# Altium PCB Display.PcbDoc
Units mil, origin at the board's own origin, x right, y up, seen from the top; angles counter-clockwise.
Board outline 5000 x 2735 mil, 2 copper layers (Top Layer, Bottom Layer), stack 65.792 mil thick; 66 components, 70 nets, 323 pads, 129 vias.
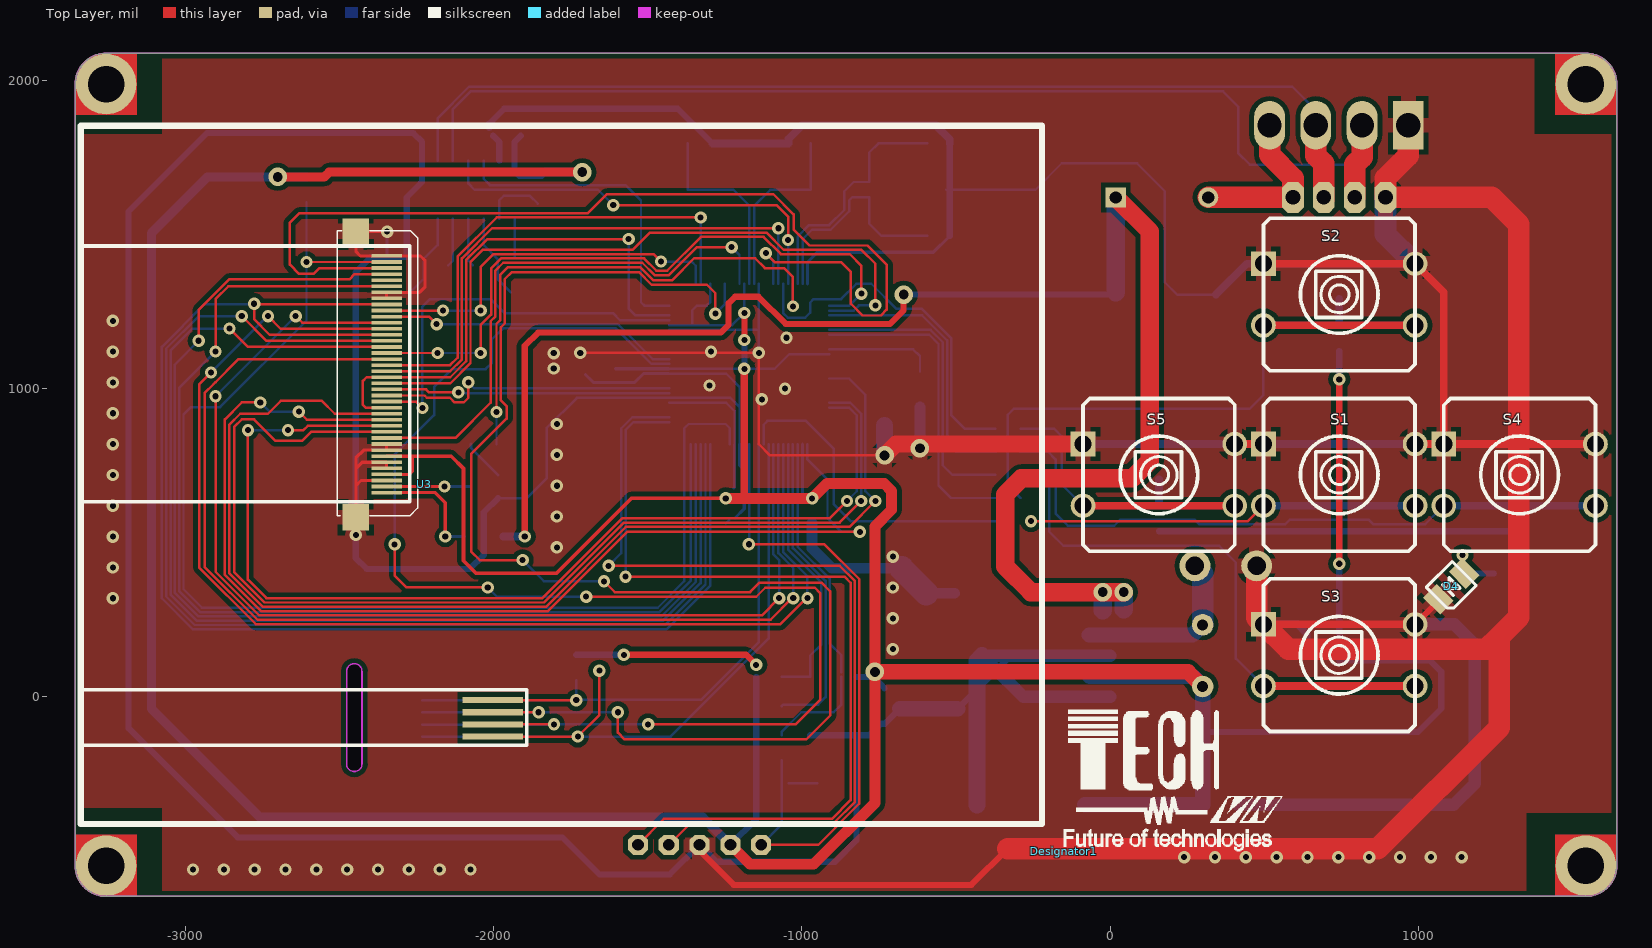
[diagram p0: Top Layer view]
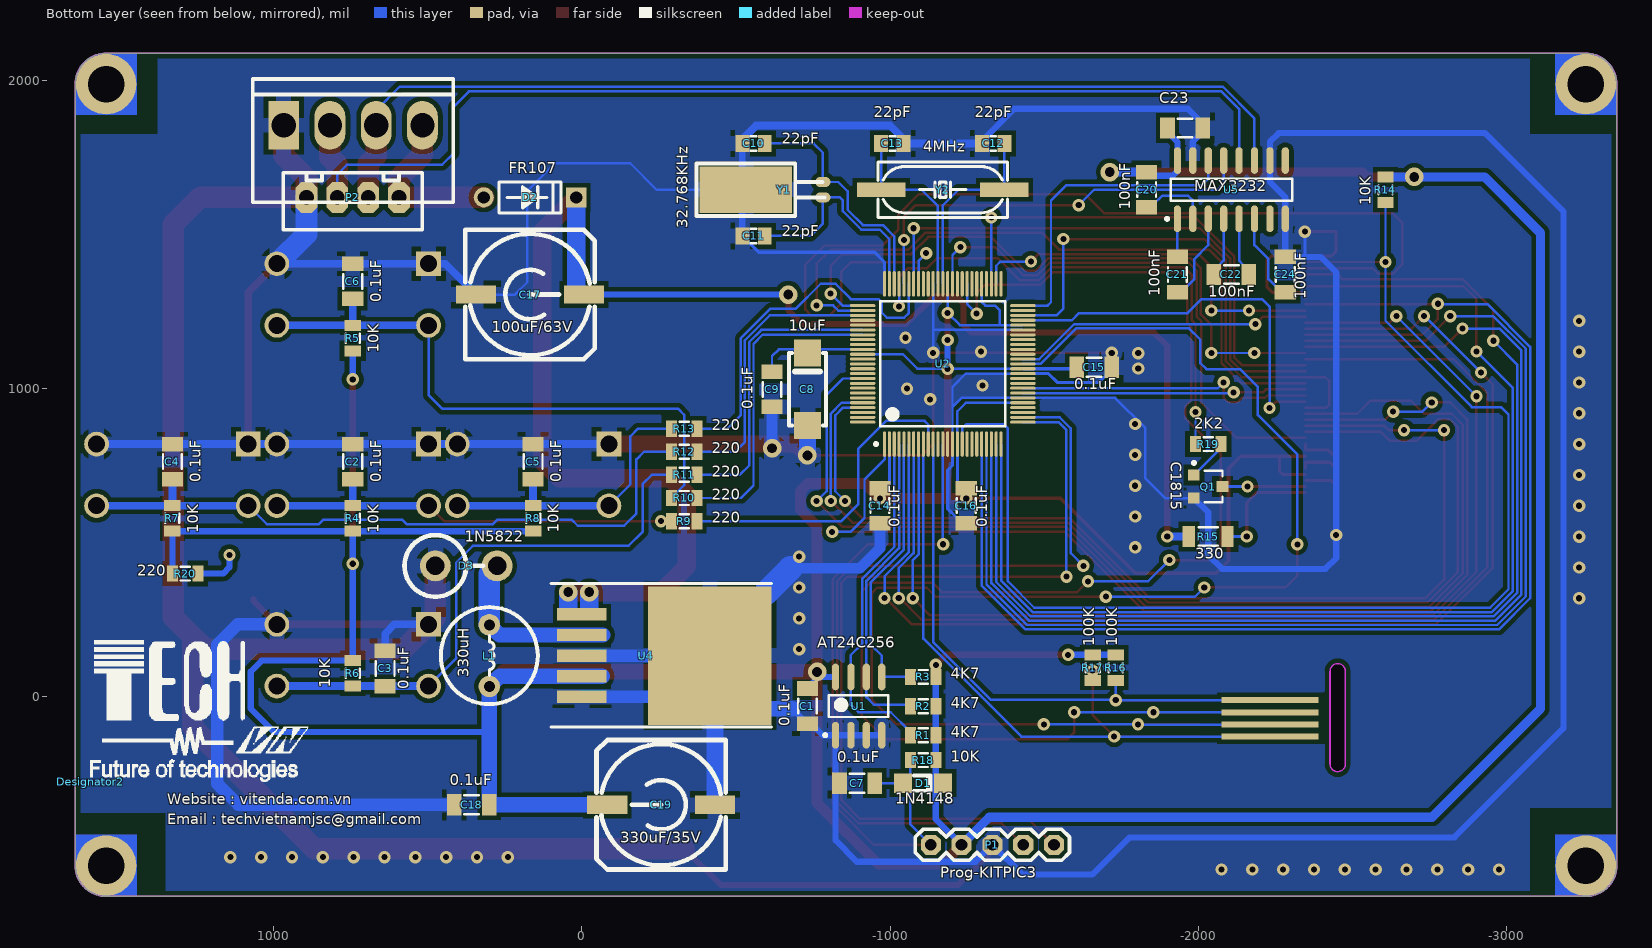
[diagram p1: Bottom Layer view, seen from below]

## Layer stack, top to bottom
Top Layer: signal copper 1.4
Dielectric: core 62.9921, FR-4, Dk 4.8
Bottom Layer: signal copper 1.4

## Board outline
-3357,-547.28 -3357,1987.72 cw(c-3257,1987.72) -3257,2087.72 1543,2087.72 cw(c1543,1987.72) 1643,1987.72 1643,-547.28 cw(c1543,-547.28) 1543,-647.28 -3257,-647.28 cw(c-3257,-547.28)
cut-out: -2427,-218.78 cw(c-2450,-218.78) -2450,-241.78 -2452.5,-241.78 cw(c-2452.5,-217.28) -2477,-217.28 -2477,81.22 cw(c-2451,81.22) -2451,107.22 cw(c-2451,83.22) -2427,83.22

## Design rules (kind name [scope] priority, off if disabled: settings)
Clearance [All] p1: gap=4
HoleSize [All] p1: absolutevalues=TRUE maxlimit=10000 minlimit=1 maxpercent=80.000 minpercent=20.000
HoleToHoleClearance [All] p1: gap=10 allowstackedmicrovias=FALSE
MinimumSolderMaskSliver [All] p1: minsoldermaskwidth=0
PolygonConnect [All] p1: connectstyle=Relief reliefconductorwidth=50 reliefentries=4 polygonreliefangle="90 Angle"
RoutingVias [All] p1: holewidth=19.68 width=40 viastyle="Through Hole" minholewidth=15.75 minwidth=20 maxholewidth=47.24 maxwidth=100
SilkToSilkClearance [All] p1: silktosilkclearance=0
SilkscreenOverComponentPads [All] p1: minsilkscreentomaskgap=0
SolderMaskExpansion SolderMaskExpansion_Vias [isvia] p1: expansion=-30
SolderMaskExpansion [All] p2: expansion=1.5
TestPointUsage [All] p1: valid=0 allowmultiple=FALSE
Testpoint [All] p1: side=15 testpointundercomponent=TRUE minsize=40 maxsize=100 preferedsize=60 minholesize=0 maxholesize=40 preferedholesize=32 testpointgrid=1 style=1023 order=0123456789
Width [All] p1: maxlimit=1001 minlimit=6 preferedwidth=10
19 further rules are at their usual default settings.

## Components (designator, comment, footprint, x,y, rotation, side; value= is the part's Value field where it differs from the comment)
C1 "0.1uF" C1206 -732,-29.78 r90 bottom
C2 "0.1uF" C1206 743,763.13 r270 bottom
C3 "0.1uF" C1206 638,92.3 r270 bottom
C4 "0.1uF" C1206 1328,763.13 r270 bottom
C5 "0.1uF" C1206 158,763.13 r270 bottom
C6 "0.1uF" C1206 743,1348.13 r270 bottom
C7 "0.1uF" C1206 -892.98,-279.78 r0 bottom
C8 "10uF" C106-SMD -732,880.22 r90 bottom
C9 "0.1uF" C1206 -617,997.72 r270 bottom
C10 "22pF" C0805 -557,1795.22 r180 bottom
C11 "22pF" C0805 -557,1495.22 r180 bottom
C12 "22pF" C0805 -1334.56,1795.22 r180 bottom
C13 "22pF" C0805 -1007.39,1795.22 r0 bottom
C14 "0.1uF" C1206 -967,620.22 r270 bottom
C15 "0.1uF" C1206 -1662,1069.31 r180 bottom
C16 "0.1uF" C1206 -1247,620.22 r270 bottom
C17 "100uF/63V" CAP-100UF/63V -7,1305.22 r0 bottom
C18 "0.1uF" C1206 357.09,-350 r180 bottom
C19 "330uF/35V" CAP-100UF/63V -82.5,-350 r180 bottom
C20 "100nF" C1206 -1832,1645.22 r90 bottom
C21 "100nF" C1206 -1932,1370.22 r90 bottom
C22 "100nF" C1206 -2107,1370.22 r0 bottom
C23 "100nF" C1206 -1957,1845.22 r180 bottom
C24 "100nF" C1206 -2282,1370.22 r90 bottom
D1 "1N4148" 1N4148-SMD -1042,-279.78 r180 bottom
D2 "FR107" DIODE-1A/300 318,1620.22 r180 bottom
D3 "1N5822" FR307 475,425 r180 bottom
D4 "LED" LED-1206/100x100 1148,400.22 r225 top
Designator1 "Comment" ?#1 -150,-500 r0 top
Designator2 "Comment" ?#1 1595,-275 r180 bottom
L1 "330uH" L-330uH 300,233.86 r270 bottom
P1 "Prog-KITPIC3" "HEADER 5B" -1132,-479.78 r180 bottom
P2 "Header 4" HEADER4X 593,1620.22 r0 bottom
Q1 "C1815" SOT23A -2032,682.4 r270 bottom
R1 "4K7" R0805 -1107,-124.27 r0 bottom
R2 "4K7" R0805 -1107,-29.78 r0 bottom
R3 "4K7" R0805 -1107,64.7 r0 bottom
R4 "10K" R0805 743,578.88 r270 bottom
R5 "10K" R0805 743,1163.88 r270 bottom
R6 "10K" R0805 743,76.56 r90 bottom
R7 "10K" R0805 1328,578.88 r270 bottom
R8 "10K" R0805 158,578.88 r270 bottom
R9 "220" R0805 -332,570.22 r0 bottom
R10 "220" R0805 -332,645.22 r0 bottom
R11 "220" R0805 -332,720.22 r0 bottom
R12 "220" R0805 -332,795.22 r0 bottom
R13 "220" R0805 -332,870.22 r0 bottom
R14 "10K" R0805 -2607,1645.22 r270 bottom
R15 "330" R1206 -2032,520.22 r0 bottom
R16 "100K" R0805 -1732,95.22 r270 bottom
R17 "100K" R0805 -1657,95.22 r270 bottom
R18 "10K" R0805 -1107,-204.78 r0 bottom
R19 "2K2" R0805 -2032,820.22 r0 bottom
R20 "220" R0805 1286.66,400.22 r0 bottom
S1 "SW-PB" BUTON-B3F 988.98,820.22 r0 top
S2 "SW-PB" BUTON-B3F 988.98,1405.22 r0 top
S3 "SW-PB" BUTON-B3F 988.98,235.22 r0 top
S4 "SW-PB" BUTON-B3F 1573.98,820.22 r0 top
S5 "SW-PB" BUTON-B3F 403.98,820.22 r0 top locked
U1 "AT24C256" 8-SOIC_751 -898,-29.78 r90 bottom
U2 "PIC24FJ256DA210" TQFP-PT100_M -982,820.22 r90 bottom
U3 "TFT32" TFT-32 -2347,662.72 r270 top locked
U4 "LM2576D2T-3.3" LM2576HVS-SMT 0,267.72 r270 bottom
U5 "MAX3232" NSO16_N -2107,1645.22 r90 bottom
Y1 "32.768KHz" ?#2 -782,1620.22 r0 bottom
Y2 "4MHz" XTA_SMD -1370.98,1645.22 r0 bottom

## Footprints (in the part's own frame and the unit in brackets; to place one, negate y for a bottom-side part, rotate by r counter-clockwise, add the part's x,y. Pads: shape width x height; smd on the part's side, far side on the other; paste and mask are expansions set on the pad)
1N4148-SMD [mm]
  rect 1.5x1.6 smd: 1(0,0) 2(3.302,0)
  silkscreen extent 0.89,-0.64 2.29,0.63, body extent 0.65,-0.64 2.65,0.62, height 0.78
8-SOIC_751 [mm] "SOIC, 8-Leads, Body 4.9x3.9mm (max), Pitch 1.27mm, IPC Medium Density"
  oval 2.2x0.6 smd: 1(-2.4,1.905) 2(-2.4,0.635) 3(-2.4,-0.635) 4(-2.4,-1.905) 5(2.4,-1.905) 6(2.4,-0.635) 7(2.4,0.635) 8(2.4,1.905)
  silkscreen extent -2.52,-2.45 0.9,2.88, body extent -1.95,-2.45 1.95,2.45, height 1.55
BUTON-B3F [mil]
  rect 80x80 hole 55.12: 1(-491.97,0)
  round 80 hole 55.12: 1(0,0) 2(-491.97,-200) 2(0,-200)
  silkscreen extent -492,-348 0,148
C106-SMD [mm]
  rect 2.2x2.2 smd: 1(5.969,0) 2(0,0)
  silkscreen extent 0,-1.52 5.97,1.52
C0805 [mm] "Chip Capacitor, 2-Leads, Body 2.0x1.3mm, IPC Medium Density"
  rect 1.15x1.4 smd: 1(-0.925,0) 2(0.925,0)
  silkscreen extent -0.22,-0.6 0.23,0.6, body extent -1,-0.63 1,0.63, height 0.85
C1206 [mm] "Chip Capacitor, 2-Leads, Body 3.2x1.6mm, IPC Medium Density"
  rect 1.2x1.75 smd: 1(-1.45,0) 2(1.45,0)
  silkscreen extent -0.6,-0.77 0.6,0.77, body extent -1.6,-0.8 1.6,0.8, height 1.6
CAP-100UF/63V [mil] "Capacitor 100uF63V SMD"
  rect 130x59 smd: 1(0,0) 2(350,0)
  silkscreen extent -35,-210 385,210
DIODE-1A/300 [mil]
  round 65 hole 39.37: 1(0,0)
  rect 65x65 hole 39.37: 2(300,0)
  silkscreen extent 50,-50 250,50
FR307 [mil]
  round 100 hole 60: 1(0,0) 2(200,0)
  silkscreen extent -100,-100 155,100
HEADER4X [mil]
  oct 70x100 hole 47.24: 1(0,0) 2(100,0) 3(200,0) 4(300,0)
  silkscreen extent -75,-80 375,105
"HEADER 5B" [mil]
  oct 65x65 hole 38: 1(0,0) 2(100,0) 3(200,0) 4(300,0) 5(400,0)
  silkscreen extent -50,-50 450,50
L-330uH [mil]
  round 70 hole 35.43: 1(0,0) 2(200,0)
  silkscreen extent -57,-157 257,157
LED-1206/100x100 [mm]
  rect 1.6x2 smd: 1(0,0) 2(3,0)
  silkscreen extent 0,-1.4 3,1.4, body extent -0.25,-1.4 3.25,1.3, height 1.95
LM2576HVS-SMT [mil]
  rect 40x160 smd: 1(0,0) 2(66.93,0) 3(133.86,0) 4(200.79,0) 5(267.72,0)
  rect 450x400 smd: 6(133.86,415.35)
  silkscreen extent -100,-100 365,615
NSO16_N [mm] "SOIC, 16-Leads, Body 9.9x3.9mm, Pitch 1.27mm, IPC Medium Density"
  oval 2.2x0.6 smd: 1(-2.4,4.445) 2(-2.4,3.175) 3(-2.4,1.905) 4(-2.4,0.635) 5(-2.4,-0.635) 6(-2.4,-1.905) 7(-2.4,-3.175) 8(-2.4,-4.445) 9(2.4,-4.445) 10(2.4,-3.175) 11(2.4,-1.905) 12(2.4,-0.635) 13(2.4,0.635) 14(2.4,1.905) 15(2.4,3.175) 16(2.4,4.445)
  silkscreen extent -2.52,-5 0.9,5.42, body extent -1.95,-4.95 1.95,4.95, height 1.75
R0805 [mm] "Chip Resistor, 2-Leads, Body 2.0x1.3mm, IPC Medium Density"
  rect 0.9x1.35 smd: 1(-1.05,0) 2(1.05,0)
  silkscreen extent -0.38,-0.58 0.38,0.58, body extent -1,-0.63 1,0.63, height 0.6
R1206 [mm] "Chip Resistor, 2-Leads, Body 3.2x1.6mm, IPC Medium Density"
  rect 1x1.75 smd: 1(-1.6,0) 2(1.6,0)
  silkscreen extent -0.8,-0.77 0.8,0.77, body extent -1.6,-0.8 1.6,0.8, height 0.6
SOT23A [mm] "SOT-23; 3 Leads; Body 3.0 x 2.5 mm, inc. leads (LxW max)"
  rect 0.9x0.95 smd: 1(-0.95,-1.175) 2(0.95,-1.175) 3(0,1.175)
  silkscreen extent -2.07,-1.3 1.3,1.18
TFT-32 [mm] "LCD TFT 3.2 inch with touch screen"
  rect 2.2x2.2 smd: 0(-21.503,-2.54) 0(2.032,-2.54)
  rect 0.3x2.5 smd: 1(0,0) 2(-0.5,0) 3(-1,0) 4(-1.5,0) 5(-2,0) 6(-2.5,0) 7(-3,0) 8(-3.5,0) 9(-4,0) 10(-4.5,0) 11(-5,0) 12(-5.5,0) 13(-6,0) 14(-6.5,0) 15(-7,0) 16(-7.5,0) 17(-8,0) 18(-8.5,0) 19(-9,0) 20(-9.5,0) 21(-10,0) 22(-10.5,0) 23(-11,0) 24(-11.5,0) 25(-12,0) 26(-12.5,0) 27(-13,0) 28(-13.5,0) 29(-14,0) 30(-14.5,0) 31(-15,0) 32(-15.5,0) 33(-16,0) 34(-16.5,0) 35(-17,0) 36(-17.5,0) 37(-18,0) 38(-18.5,0) 39(-19,0) 40(-19.5,0)
  rect 0.5x5 smd: 41(20.1,8.75) 42(19.1,8.75) 43(18.1,8.75) 44(17.1,8.75)
  silkscreen extent -30.23,-25.2 27.31,54
TQFP-PT100_M [mm] "Thin QFP, 100-Leads, Body 12x12mm, Pitch 0.4mm, IPC Low Density"
  oval 2.1x0.254 smd: 1(0,0) 2(0,-0.4) 3(0,-0.8) 4(0,-1.2) 5(0,-1.6) 6(0,-2) 7(0,-2.4) 8(0,-2.8) 9(0,-3.2) 10(0,-3.6) 11(0,-4) 12(0,-4.4) 13(0,-4.8) 14(0,-5.2) 15(0,-5.6) 16(0,-6) 17(0,-6.4) 18(0,-6.8) 19(0,-7.2) 20(0,-7.6) 21(0,-8) 22(0,-8.4) 23(0,-8.8) 24(0,-9.2) 25(0,-9.6) 51(13.2,-9.6) 52(13.2,-9.2) 53(13.2,-8.8) 54(13.2,-8.4) 55(13.2,-8) 56(13.2,-7.6) 57(13.2,-7.2) 58(13.2,-6.8) 59(13.2,-6.4) 60(13.2,-6) 61(13.2,-5.6) 62(13.2,-5.2) 63(13.2,-4.8) 64(13.2,-4.4) 65(13.2,-4) 66(13.2,-3.6) 67(13.2,-3.2) 68(13.2,-2.8) 69(13.2,-2.4) 70(13.2,-2) 71(13.2,-1.6) 72(13.2,-1.2) 73(13.2,-0.8) 74(13.2,-0.4) 75(13.2,0)
  oval 0.254x2.1 smd: 26(1.8,-11.4) 27(2.2,-11.4) 28(2.6,-11.4) 29(3,-11.4) 30(3.4,-11.4) 31(3.8,-11.4) 32(4.2,-11.4) 33(4.6,-11.4) 34(5,-11.4) 35(5.4,-11.4) 36(5.8,-11.4) 37(6.2,-11.4) 38(6.6,-11.4) 39(7,-11.4) 40(7.4,-11.4) 41(7.8,-11.4) 42(8.2,-11.4) 43(8.6,-11.4) 44(9,-11.4) 45(9.4,-11.4) 46(9.8,-11.4) 47(10.2,-11.4) 48(10.6,-11.4) 49(11,-11.4) 50(11.4,-11.4) 76(11.4,1.8) 77(11,1.8) 78(10.6,1.8) 79(10.2,1.8) 80(9.8,1.8) 81(9.4,1.8) 82(9,1.8) 83(8.6,1.8) 84(8.2,1.8) 85(7.8,1.8) 86(7.4,1.8) 87(7,1.8) 88(6.6,1.8) 89(6.2,1.8) 90(5.8,1.8) 91(5.4,1.8) 92(5,1.8) 93(4.6,1.8) 94(4.2,1.8) 95(3.8,1.8) 96(3.4,1.8) 97(3,1.8) 98(2.6,1.8) 99(2.2,1.8) 100(1.8,1.8)
  silkscreen extent -0.12,-9.95 11.75,0.82, body extent 0.6,-10.8 12.6,1.2, height 1.2
XTA_SMD [mm]
  rect 4x1.2 smd: 1(0,0) 2(10.16,0)
  silkscreen extent -0.25,-2.29 10.41,2.29
?#1 [mil]
  silkscreen extent 0,0 708,458
?#2 [mil]
  rect 300x150 smd: 0(250,-25)
  oval 50x32 smd: 1(0,0) 2(0,-50)
  silkscreen extent -5,-110 410,60

## Part data
C1 C2 C3 C4 C5 C6 C7 C9 C10 C11 C12 C13 C14 C15 C16 C18: library part Cap, "Capacitor"
C8 C17 C19: library part "Cap Pol1", "Polarized Capacitor (Radial)"
C20 C21 C22 C23 C24: library part Cap, "CAP CER .1UF 16V 10% X7R 0603"
D1 D2: library part "Diode 1N4148", "High Conductance Fast Diode"
D3: library part DIODE, "Diode"
D4: library part LED0, "Typical INFRARED GaAs LED"
L1: library part "Inductor Iron", "Magnetic-Core Inductor"
P1: library part "Header 5", "Header, 5-Pin"
P2: "Header, 4-Pin"
Q1: library part NPN, "NPN Bipolar Transistor"
R1 R2 R3 R4 R5 R6 R7 R8 R9 R10 R11 R12 R13 R14 R15 R16 R17 R18 R19 R20: library part Res1, "Resistor"
S1 S2 S3 S4 S5: "Switch"
U1: library part 24AA1025-I/SM, "1 Mbit, 400kHz, 1.7V, I2C Serial EEPROM, 8-Pin SOIC 208mil, Industrial Temperature"
U2: "Graphic Controller"
U3: "LCD TFT 3.2 inch with touch screen"
U4: "Easy Switcher 3.0A Step-Down Voltage Regulator"
U5: library part MAX3232CSE, "3.0V TO 5.5V, Low-Power, up to 1Mbps, True RS-232 Transceiver Using Four 0.1µF External Capacitor"
Y1 Y2: library part XTAL, "Crystal Oscillator"

## Free pads (board coordinates)
  round 196.85 hole 118.11: 0(-3257,-547.28) 0(-3257,1987.72) 0(1543,-547.28) 0(1543,1987.72)
  rect 100x157.48 hole 78.74: 1(967,1854.22)
  rect 314.96x19.68 smd far side: 2(-2232,-10.51) 6(-2232,-50.32) 7(-2232,-89.69) 8(-2232,-128.62)
  oval 100x157.48 hole 78.74: 2(817,1854.22) 3(667,1854.22) 4(517,1854.22)

## Via types
v1: diameter 40, hole 19.68, Top Layer to Bottom Layer, 120 vias
v2: diameter 60, hole 31.5, Top Layer to Bottom Layer, 8 vias
v3: diameter 38, hole 19.68, Top Layer to Bottom Layer, 1 vias

## Nets (pads, with @x,y where several pads share a name; then routed paths per layer and width w, separated by ;. In a path a pad name is that pad's centre, name@x,y a point inside that pad or via, vN(x,y) a via of type N, cw(c..) or ccw(c..) an arc to the next point about the centre after c; other vN are vias at no path point)
+20V: C17.1 D2.2 R15.2 U4.1 | length 5299.9
  Top Layer w20: v1(-1899,520.22) -1899,1139 -1856,1182 -1263,1182 -1238,1207 -1238,1277 -1217,1298 -1141,1298 -1053,1210 -714,1210 -670,1254 v2@-670,1321
  Top Layer w60: D2.2 129,1509.22 129,766 72,709 -288,709 -341,656 -341,424 -257,340 v2(-24,340) v2(44,340)
  Bottom Layer w20: v2@-671,1305.22 C17.1
  Bottom Layer w25: R15.2 v1(-1899,520.22)
  Bottom Layer w60: U4.1@-24,281 v2(-24,340) ; C17.1@18,1312.22 D2.2 ; U4.1@44,285 v2(44,340)
  other v2: -670,1305.22
BACKLIGHT: R19.2 U2.72 | length 1766.2
  Top Layer w8: v1@-1991,921 v1@-1991,924.34 ; v1(-1990.66,924.34) -1990.66,1210.34 -1978,1223 -1978,1370 -1955,1393 -1524,1393 -1482,1351 -1422,1351 -1350,1423 -1152,1423 -1120,1391 -1058,1391 -1029.24,1362.24 v3(-1029.24,1267)
  Bottom Layer w8: R19.2 v1(-1990.66,924.34) ; v3@-1029.24,1258 v3(-1029.24,1267) U2.72
CS: R14.2 U2.17 U3.39 | length 4121.4
  Top Layer w8: v1(-2607,1410.75) U3.39
  Bottom Layer w8: v1@-2607,1405.22 -2607,1220.22 -2887,940.22 -2982,940.22 -3006,916.22 -3006,349.02 -2946.2,289.22 -1467.8,289.22 -1382,375.01 -1382,870.22 -1367,885.22 -1247,885.22 -1233.97,872.18 U2.17 ; v1(-2607,1410.75) R14.2
DC: U2.25 U3.35 | length 3741.6
  Top Layer w8: v1(-2902,1120.22) -2902,1290.22 -2860.21,1332.01 U3.35
  Bottom Layer w8: v1(-2902,1120.22) -3020,1002.22 -3020,343.22 -2952,275.22 -1462,275.22 -1359.95,377.26 U2.25
DOWN: C3.2 R6.1 R11.2 S3.2 | length 2328.3
  Top Layer w25: S3.2@497.02,35.22 S3.2@988.98,35.22
  Bottom Layer w8: R11.2 -227,720.22 -197,690.22 -197,535.22 -152,490.22 353,490.22 408,435.22 408,124.23 S3.2@497.02,35.22
  Bottom Layer w25: S3.2@497.02,35.22 C3.2 R6.1 S3.2@988.98,35.22
ENTER: C2.2 R4.1 R9.2 S1.2 | length 1352.5
  Top Layer w8: v1(-257,570.22) 447.02,570.22 S1.2@497.02,620.22
  Bottom Layer w25: S1.2@497.02,620.22 R4.1 ; C2.2 R4.1 ; S1.2@988.98,620.22 R4.1
GCLK: U2.1 U3.13 | length 3681.2
  Top Layer w8: v1(-2757,955.22) -2817,955.22 -2872,900.22 -2872,395.82 -2754.4,278.22 -1824,278.22 -1567,535.22 v1(-812,535.22) ; v1(-2632,925.22) -2605.72,898.94 U3.13
  Bottom Layer w8: v1(-2757,955.22) -2727,925.22 v1(-2632,925.22) ; U2.1 -982,770.22 -917,705.22 -917,580.22 -872,535.22 v1(-812,535.22)
GD0: U2.6 U3.28 | length 3926
  Top Layer w8: v1(-2917,1052.22) -2955.5,1013.72 -2955.5,419.93 -2771.79,236.22 -1069.57,236.22 -985.57,320.22 v1(-982,320.22) ; v1(-2732,1235.22) -2691,1194.21 U3.28
  Bottom Layer w8: v1(-2917,1052.22) v1@-2734,1235.22 ; U2.6 -1060.74,470.22 -982,391.48 v1(-982,320.22)
GD1: U2.8 U3.29 | length 3658.2
  Top Layer w8: v1(-2902,975.22) -2902,406.02 -2760.19,264.22 -1130,264.22 v1(-1074,320.22) ; v1(-2642,1235.22) -2620.68,1213.9 U3.29
  Bottom Layer w8: v1(-2902,975.22) v1(-2642,1235.22) ; U2.8 -1092.24,462.11 -1074,443.88 v1(-1074,320.22)
GD2: U2.39 U3.30 | length 973.2
  Top Layer w8: U3.30 -2209.37,1233.58 v1(-2185,1209.22)
  Bottom Layer w8: v1(-2185,1209.22) -1597.22,1209.22 -1483.81,1095.81 U2.39
GD3: U2.52 U3.31 | length 1235.3
  Top Layer w8: U3.31 v1(-2164,1253.27) ; v1(-2042,1253.27) -2042,1394.22 -2000,1436.22 -1481,1436.22 v1(-1457,1412.22)
  Bottom Layer w8: v1(-2164,1253.27) v1(-2042,1253.27) ; v1(-1457,1412.22) -1358,1412.22 -1344.2,1398.42 U2.52
GD4: U2.21 U3.27 U3.32 | length 4441.2
  Top Layer w8: U3.27 -2662,1174.53 -2726.31,1174.53 -2777,1225.22 v1(-2777,1275.22) -2774.74,1272.95 U3.32
  Bottom Layer w8: v1@-2778.21,1274.01 -2937.4,1274.01 -3076,1135.41 -3076,320.02 -2975.2,219.22 -1438.8,219.22 -1296.96,361.06 U2.21
GD5: U2.22 U3.26 | length 3892.1
  Top Layer w8: v1(-2817,1235.22) -2736.63,1154.84 U3.26
  Bottom Layer w8: v1@-2817.8,1234.41 -2957.2,1234.41 -3062,1129.61 -3062,325.82 -2969.4,233.22 -1444.6,233.22 -1312.71,365.11 U2.22
GD6: U2.23 U3.25 | length 3803.1
  Top Layer w8: v1(-2857,1195.22) -2796.94,1135.16 U3.25
  Bottom Layer w8: v1@-2857.4,1194.81 -2977,1194.81 -3048,1123.81 -3048,331.62 -2963.6,247.22 -1450.4,247.22 -1328.46,369.16 U2.23
GD7: U2.76 U3.24 | length 2119.8
  Top Layer w8: U3.24 v1(-2181.74,1115.47) ; v1@-2042,1115.22 v1(-2042,1115.47) -2042,1206.22 -2008,1240.22 -2008,1390.22 -1976,1422.22 -1512,1422.22 -1472,1382.22 -1437,1382.22 -1327,1492.22 -1124,1492.22 -1068,1436.22 -845,1436.22 -807,1398.22 v1(-807,1308.22)
  Bottom Layer w8: v1(-2181.74,1115.47) v1(-2042,1115.47) ; U2.76 -846.18,1269.04 v1(-807,1308.22)
GD8: U2.7 U3.23 | length 3737.5
  Top Layer w8: -2902,1021.22 -2907.5,1015.72 ; U3.23 -2827.43,1095.79 -2907.5,1015.72 ; v1(-1028,320.22) -1031.57,320.22 -1101.57,250.22 -2765.99,250.22 -2937.5,421.72 -2937.5,985.72 -2907.5,1015.72
  Bottom Layer w8: U2.7 -1076.49,466.17 -1028,417.68 v1(-1028,320.22)
GD9: U2.53 U3.22 | length 1624.5
  Top Layer w8: U3.22 -2141.11,1076.1 -2117,1100.22 -2117,1428.22 -1990,1555.22 v1(-1328.46,1555.22)
  Bottom Layer w8: U2.53 v1(-1328.46,1555.22)
GD10: U2.69 U3.21 | length 1835.1
  Top Layer w8: U3.21 -2141,1056.42 -2103,1094.42 -2103,1422.42 -2005.2,1520.22 v1(-1076.49,1520.22)
  Bottom Layer w8: U2.69 v1(-1076.49,1520.22)
GD11: U2.77 U3.19 | length 2312.7
  Top Layer w8: U3.19 -2140.77,1017.05 -2075,1082.82 -2075,1410.82 -2035.6,1450.22 -1549,1450.22 -1493,1506.22 -1115,1506.22 -1059,1450.22 -807,1450.22 -762,1405.22 v1(-762,1270.22)
  Bottom Layer w8: U2.77 -832,1253.29 -815.07,1270.22 v1(-762,1270.22)
GD12: U2.32 U3.18 | length 921.1
  Top Layer w8: U3.18 -2219.15,997.36 -2209.47,987.69 v1(-2114.53,987.69)
  Bottom Layer w8: v1(-2114.53,987.69) -2112.41,985.57 U2.32
GD13: U2.33 U3.17 | length 989.5
  Top Layer w8: U3.17 -2224.46,977.68 -2217,970.22 -2142,970.22 -2127,955.22 -2097,955.22 -2082,970.22 v1(-2082,1020.22)
  Bottom Layer w8: v1(-2082,1020.22) -2063.1,1001.32 U2.33
GD14: U2.47 U3.16 | length 1292.1
  Top Layer w8: U3.16 -2251.78,957.99 v1(-2231,937.22)
  Bottom Layer w8: v1(-2231,937.22) -2231,1266.22 -2207,1290.22 -2010,1290.22 -1965,1245.22 -1613.42,1245.22 -1589.99,1221.79 U2.47
GD15: U2.48 U3.15 U3.20 | length 1763.9
  Top Layer w8: U3.15 -2415.31,938.31 -2424,947 -2424,1025 -2412.27,1036.73 U3.20 -2140.89,1036.73 -2089,1088.62 -2089,1416.62 -2020.4,1485.22 v1(-1562,1485.22)
  Bottom Layer w8: v1@-1562,1480.22 -1562,1260.22 -1539.32,1237.54 U2.48
GEN: U2.91 U3.14 | length 3824.4
  Top Layer w8: U3.14 -2515.41,918.62 -2557,960.22 -2690.41,960.22 -2732,918.62 -2822,918.62 -2857,883.62 -2857,400.62 -2748.6,292.22 -1830.4,292.22 -1571.4,551.22 -846,551.22 v1(-762,635.22) v1@-765.57,635.22
  Bottom Layer w8: U2.91 -847,1032.81 -794,979.81 -794,667.22 v1(-762,635.22)
GND: C1.1 C2.1 C3.1 C4.1 C5.1 C6.1 C7.2 C8.2 C9.2 C10.1 C11.1 C12.1 C13.1 C14.2 C15.2 C16.2 C17.2 C18.1 C19.2 C23.2 C24.2 D3.1 D4.2 P1.3 P2.4 pad.1 Q1.2 S1.1 S2.1 S3.1 S4.1 S5.1 U1.1 U1.2 U1.3 U1.4 U2.15 U2.31 U2.36 U2.45 U2.65 U2.75 U3.0 U3.3 U3.5 U3.6 U3.8 U3.9 U3.33 U3.34 U3.40 U4.3 U4.5 U4.6 U5.8 U5.10 U5.15 Y1.0 | length 33536.8
  Top Layer w8: v1(-1719,1116) v1(-1139.48,1116) -1139.48,819.48 -1103.22,783.22 v2(-732,783.22)
  Top Layer w10: U3.0@-2447,582.72 -2447,685.22 ; U3.3 -2430.13,702.09 -2447,685.22 ; U3.5 U3.6 -2426.07,761.14 -2447,740.22 ; U3.9 U3.8 -2421.7,800.51 -2447,775.22 -2447,740.22 ; U3.33 U3.34 -2239.89,1312.32 -2222,1330.22 -2222,1415.22 -2237.22,1430.43 U3.40 -2432.22,1430.43 -2447,1445.22 -2447,1509.29 v1(-2345.29,1509.29) ; -2447,685.22 -2447,740.22
  Top Layer w20: P1.3 -1332,-499 -1221,-610 -450,-610 -333,-493 ; S3.1@988.98,235.22 1064.48,310.72 D4.2
  Top Layer w25: S5.1@403.98,820.22 S1.1@497.02,820.22 ; S3.1@497.02,235.22 S3.1@988.98,235.22 ; S2.1@497.02,1405.22 988.98,1405.22 1082.02,1312.18 S4.1@1082.02,820.22 ; S1.1@988.98,820.22 S4.1@1082.02,820.22 ; S4.1@1573.98,820.22 1325,820.22 S4.1@1082.02,820.22
  Top Layer w40: S3.1@475,257.23 S3.1@497.02,235.22
  Top Layer w55: v2(-732,783.22) -695,820.22 S5.1@-87.98,820.22
  Top Layer w70: -333,-493 868,-493 1261.5,-99.5 1261.5,195.5 ; D3.1 475,257.23 497.02,235.22 578.23,154 1220,154 1261.5,195.5 ; pad.1 967,1756.22 893,1682.22 P2.4 1237.78,1620.22 1325,1533 1325,820.22 1325,259 1261.5,195.5
  Bottom Layer w8: Q1.2 -1892,645 -1828,709 -1828,872 -1730.18,969.82 U2.31 -1231.61,969.82 -1202.47,940.69 ; U2.36 -1245.35,1048.56 -1202.47,1005.69 -1202.47,940.69 ; U2.45 -1139.48,1190.3 ; C16.2 C16.2@-1235.88,574.25 ; U2.15 -1202.47,940.69 ; v1(-1139.48,1116) -1139.48,1190.3 ; U2.65 -1139.48,1190.3 ; U1.3 U1.2 ; Y1.0 -242.78,1645.22 -157,1731 87,1731 177,1641 177,1345 216.78,1305.22 C17.2
  Bottom Layer w10: -2352,1427.3 -2345.29,1434.01 v1(-2345.29,1509.29) ; C15.2@-1702,1045.22 -1677,1020.22 -1542,1020.22 -1513.65,1048.56 U2.36 ; C16.2@-1217,580.22 -1187,610.22 -1187,735.22 -1202.47,750.69 U2.15 ; U2.75 -982,1410.22 -950,1442.22 -573.58,1442.22 C11.1
  Bottom Layer w20: C23.2 -2014.09,1859.91 -1966,1908 -1403,1908 C12.1@-1290.22,1795.22 ; C23.2@-2002,1820.22 -1982,1800.22 U5.15 ; Q1.2 -2032,598.74 -2032,460.22 -2077,415.22 -2412,415.22 -2447,450.22 v1(-2447,525.22) -2447,1377 -2396.7,1427.3 -2352,1427.3 C24.2 U5.8 -2282,1620.22 -2232,1670.22 U5.10 -2232,1800 -2261,1829 -2930,1829 -3184,1575 -3184,-102 -2830,-456 -1777,-456 -1657,-576 -1428.22,-576 P1.3 -1277,-534.78 -892,-534.78 -823,-465.78 U1.1 ; U1.4 U1.3 U1.2 U1.1 ; -682.91,-37.78 C1.1 -744.09,-86.87 -781.49,-124.27 U1.1 ; C11.1 C10.1 ; U4.6@-494,-37.78 U4.6@-322.35,133.86
  Bottom Layer w25: C12.1@-1290.22,1795.22 C13.1 -1043.81,1809.41 -1000,1853.22 -565,1853.22 -520.58,1808.8 C10.1 ; S5.1@-87.98,820.22 168,820.22 403.98,820.22 497.02,820.22 C2.1 988.98,820.22 1082.02,820.22 S4.1@1573.98,820.22 ; C17.2 443,1405.22 497.02,1405.22 C6.1 S2.1@988.98,1405.22 ; S3.1@497.02,235.22 608,235.22 638,205.22 C3.1
  Bottom Layer w35: C14.2 -967,482.22 -902,417.22 -677.22,417.22 ; v2(-617,806.22) C9.2 ; U4.6@-596.22,336.22 U4.6@-505,336.22
  Bottom Layer w40: U4.5 -281.5,0 U4.6 U4.3 ; C18.1 1114,-350 1182,-282 1182,170 1116.78,235.22 S3.1@988.98,235.22
  Bottom Layer w50: -682.91,-37.78 U4.6@-494,-37.78
  Bottom Layer w55: v2(-732,783.22) C8.2 ; C19.2 -432.5,116.71 U4.6
  Bottom Layer w70: P2.4 893,1501.2 S2.1@988.98,1405.22
  Bottom Layer w80: -677.22,417.22 U4.6@-596.22,336.22
  other v1: -2975,-560 -2875,-560 -2775,-560 -2675,-560 -2575,-560 -2475,-560 -2375,-560 -2275,-560 -2175,-560 -2075,-560 240,-520 340,-520 440,-520 540,-520 640,-520 740,-520 840,-520 940,-520 1040,-520 1140,-520 -705,155 -705,255 -3235,320 -705,355 -3235,420 -705,455 -1795,485 -3235,520 -1795,585 -3235,620 -1795,685 -3235,720 -1795,785 -3235,820 -1795,885 -3235,920 -1130,965 -1055,1000 -1300,1010 -3235,1020 -1805,1065 -1805,1115 -3235,1120 -1295,1120 -1050,1165 -3235,1220
HSYNC: U2.97 U3.12 | length 3430
  Top Layer w8: v1(-2797,865.22) -2797,380.22 -2737,320.22 -1842,320.22 -1583,579.22 -910,579.22 v1(-854,635.22) ; v1(-2667,865.22) -2617,865.22 -2602.96,879.25 U3.12
  Bottom Layer w8: v1(-2797,865.22) v1(-2667,865.22) ; U2.97 -847,938.33 -822,913.33 -822,708 -822,667.22 v1(-854,635.22)
LEFT: C5.2 R8.1 R13.2 S5.2 | length 1467.4
  Top Layer w25: S5.2@-87.98,620.22 S5.2@403.98,620.22
  Bottom Layer w8: R13.2 -182,870.22 -157,845.22 -157,689.23 S5.2@-87.98,620.22
  Bottom Layer w25: S5.2@-87.98,620.22 R8.1 ; C5.2 R8.1 ; S5.2@403.98,620.22 168,620.22 R8.1
MOSI: U2.24 U3.37 | length 3822.4
  Top Layer w8: v1(-2957,1155.22) -2957,1255.02 -2857.8,1354.22 -2468,1354.22 -2450.84,1371.38 U3.37
  Bottom Layer w8: v1(-2957,1155.22) -3034,1078.22 -3034,337.42 -2957.8,261.22 -1456.2,261.22 -1344.2,373.21 U2.24
NetC8_1: C8.1 C9.1 U2.85 | length 353.7
  Bottom Layer w8: U2.85 -639.09,1127.3 -617,1105.22 C9.1
NetC10_2: C10.2 U2.73 Y1.2 | length 789.6
  Bottom Layer w8: U2.73 -1013.5,1493.72 -977,1530.22 -912,1530.22 -862,1580.22 -862,1640.22 -832,1670.22 Y1.2 -782,1765.22 -752,1795.22 C10.2
NetC11_2: C11.2 U2.74 Y1.1 | length 727.2
  Bottom Layer w8: U2.74 -997.75,1484.47 -967,1515.22 -907,1515.22 -847,1575.22 -847,1610.22 -837,1620.22 Y1.1 -782,1535.22 -742,1495.22 C11.2
NetC12_2: C12.2 U2.63 Y2.1 | length 625.4
  Bottom Layer w8: C12.2 Y2.1 -1222,1645.22 -1170.98,1594.19 U2.63
NetC13_2: C13.2 U2.64 Y2.2 | length 608.4
  Bottom Layer w8: U2.64 -1155.23,1591.99 -1102,1645.22 Y2.2 C13.2
NetC20_1: C20.1 U5.2 | length 201.1
  Bottom Layer w8: U5.2 -1982,1610.22 -1967,1625.22 -1882,1625.22 C20.1@-1857,1600.22
NetC21_1: C21.1 U5.3 | length 273.7
  Bottom Layer w8: U5.3 -2032,1465.22 -1987,1420.22 -1987,1355.22 C21.1@-1944.91,1313.13
NetC21_2: C21.2 U5.1 | length 123.4
  Bottom Layer w8: C21.2 U5.1
NetC22_1: C22.1 U5.5 | length 156.7
  Bottom Layer w8: C22.1@-2147,1400.22 -2132,1415.22 U5.5
NetC22_2: C22.2 U5.4 | length 156.7
  Bottom Layer w8: U5.4 -2082,1415.22 C22.2@-2067,1400.22
NetC24_1: C24.1 U5.6 | length 286.6
  Bottom Layer w8: C24.1 -2269.09,1313.13 -2227,1355.22 -2227,1420.22 -2182,1465.22 U5.6
NetD2_1: D2.1 P2.1 pad.4 | length 540.5
  Top Layer w70: D2.1 P2.1 593,1682.22 517,1758.22 pad.4
NetD3_2: D3.2 L1.1 U4.2 | length 583.2
  Bottom Layer w50: U4.2@-68,200.79 U4.2 266.93,200.79 L1.1
  Bottom Layer w70: D3.2 300,400 L1.1
NetD4_1: D4.1 R20.1 | length 150.6
  Bottom Layer w20: v1(1143,460.22) 1143,420.22 1163,400.22 R20.1
NetP2_2: P2.2 pad.3 U5.11 | length 3311.3
  Top Layer w70: pad.3 667,1756.22 693,1730.22 P2.2@693,1612.22
  Bottom Layer w8: U5.11 -2182,1876.8 -2079.8,1979 591,1979 pad.3@666,1904
NetP2_3: P2.3 pad.2@817,1854.22 U5.12 | length 3634.5
  Top Layer w70: P2.3 793,1727.22 817,1751.22 pad.2@817,1854.22
  Bottom Layer w8: U5.12 -2132,1907 -2075,1964 366,1964 415,1915 415,1764 453,1726 762,1726 793,1695 P2.3
NetQ1_1: Q1.1 R19.1 | length 136.7
  Bottom Layer w10: R19.1 -2073.34,807.4 Q1.1
NetQ1_3: Q1.3 U3.2 | length 268.7
  Top Layer w10: U3.2 v1(-2159.18,682.4)
  Bottom Layer w10: v1(-2159.18,682.4) Q1.3
NetR9_1: R9.1 U2.10 | length 1058.6
  Bottom Layer w8: U2.10 -1123.73,883.48 -1112,895.22 -987,895.22 -897,805.22 -897,625.22 -842,570.22 R9.1
NetR10_1: R10.1 U2.82 | length 1026.5
  Bottom Layer w8: U2.82 -586.33,1174.55 -557,1145.22 -557,685.22 -517,645.22 R10.1
NetR11_1: R11.1 U2.81 | length 966.7
  Bottom Layer w8: U2.81 -582.28,1190.3 -543,1151.02 -543,751.22 -512,720.22 R11.1
NetR12_1: R12.1 U2.78 | length 914.1
  Bottom Layer w8: U2.78 -609.73,1237.54 -529,1156.81 -529,827.22 -497,795.22 R12.1
NetR13_1: R13.1 U2.70 | length 1194
  Bottom Layer w8: U2.70 -1060.74,1245 -1045.74,1230 -989.61,1230 -973.61,1246 -973.61,1278.61 -962,1290.22 -873,1290.22 -823,1340.22 -775,1340.22 -693.2,1258.41 -610.8,1258.41 -515,1162.61 -515,913.22 -472,870.22 R13.1
NetR15_1: R15.1 U3.1 | length 375.5
  Top Layer w10: U3.1 -2189.5,662.72 -2157,630.22 v1(-2157,520.22)
  Bottom Layer w10: v1(-2157,520.22) R15.1
PGC: P1.5 U2.26 | length 2820.2
  Top Layer w8: v1(-1572,390.22) -862,390.22 -842,370.22 -842,-334.78 -903,-395.78 -1448,-395.78 P1.5
  Bottom Layer w8: v1(-1572,390.22) -1572,865.22 -1546.13,891.08 U2.26
PGD: P1.4 U2.27 | length 2830.4
  Top Layer w8: v1(-1627,425.22) -877.2,425.22 -828,376.02 -828,-340.58 -897.2,-409.78 -1362,-409.78 P1.4
  Bottom Layer w8: v1(-1627,425.22) -1586,466.22 -1586,871.02 -1550.18,906.83 U2.27
RESETLCD: U2.61 U3.10 | length 1780.2
  Top Layer w8: U3.10 -2124.12,839.88 -2010,954 -2010,1218.42 -1994,1234.42 -1994,1383 -1968.78,1408.22 -1517.8,1408.22 -1477.8,1368.22 -1431.2,1368.22 -1340.42,1459 v1(-1228,1459)
  Bottom Layer w8: v1(-1228,1459) -1202.47,1433.47 U2.61
RIGHT: C4.2 R7.1 R12.2 S4.2 | length 2204.2
  Bottom Layer w8: R12.2 -202,795.22 -177,770.22 -177,595.22 -137,555.22 13,555.22 33,575.22 273,575.22 288,560.22 568,560.22 583,575.22 838,575.22 853,560.22 1022.02,560.22 S4.2@1082.02,620.22
  Bottom Layer w25: S4.2@1082.02,620.22 R7.1 ; C4.2 R7.1 ; S4.2@1573.98,620.22 R7.1
RX: U2.50 U5.14 | length 1024.3
  Bottom Layer w8: U5.14 -2032,1680.22 -2012,1660.22 -1572,1660.22 -1522,1610.22 -1522,1280.22 -1510.82,1269.04 U2.50
SCK: U2.68 U3.38 | length 3367.8
  Top Layer w8: U3.38 -2565.15,1391.06 -2584,1372.22 -2631,1372.22 -2661,1402.22 -2661,1538.22 -2630,1569.22 -1694,1569.22 -1632,1631.22 -1093,1631.22 -1027,1565.22 -1027,1516.22 -975,1464.22 -787,1464.22 -725,1402.22 -725,1256.22 -744,1237.22 -803,1237.22 -841,1275.22 -841,1378.22 -872,1409.22 -1087,1409.22 v1(-1117,1439.22)
  Bottom Layer w8: v1(-1117,1439.22) -1092.24,1414.45 U2.68
SCL: R2.2 U1.6 U2.4 | length 1029.7
  Bottom Layer w8: R2.2 -1060.66,-24.78 -1037,-24.78 ; -1047,-24.78 -1037,-24.78 ; U2.4 -1029.24,482.66 -923,376.42 U1.6 -923,-0.78 -947,-24.78 -1037,-24.78
SDA: R3.2 U1.5 U2.5 | length 907.8
  Bottom Layer w8: R3.2 U1.5 -973,134.22 -937,170.22 -937,370.62 -1044.99,478.61 U2.5
TX: U2.71 U5.13 | length 1374.1
  Top Layer w8: v1(-1612,1595.22) -1082,1595.22 -1044.99,1558.21 v1(-1044.99,1482.22)
  Bottom Layer w8: U5.13 -2082,1665.22 -2062,1645.22 -1662,1645.22 v1(-1612,1595.22) ; U2.71 v1(-1044.99,1482.22)
UP: C6.2 R5.1 R10.2 S2.2 | length 2438.4
  Top Layer w25: S2.2@497.02,1205.22 S2.2@988.98,1205.22
  Bottom Layer w8: R10.2 -332,686.56 -332,915.22 -312,935.22 453,935.22 497.02,979.23 S2.2@497.02,1205.22
  Bottom Layer w25: S2.2@497.02,1205.22 R5.1 ; C6.2 R5.1 ; S2.2@988.98,1205.22 R5.1
VCC: C1.2 C14.1 C15.1 C16.1 C18.2 C19.1 C20.2 C23.1 D1.2 L1.2 P1.2 R1.1 R2.1 R3.1 R4.2 R5.2 R6.2 R7.2 R8.2 R14.1 R16.1 R17.1 R18.1 R20.2 U1.8 U2.2 U2.16 U2.30 U2.37 U2.46 U2.55 U2.62 U2.86 U3.4 U3.7 U4.4 U5.16 | length 19046
  Top Layer w10: U3.4 -2273,721.77 -2263,731.77 -2263,780.83
  Top Layer w12: U3.7 -2263,780.83 -2137.83,780.83 -2098,741 -2098,442 -2057,401 -1796,401 -1553,644 v1(-1247,644)
  Top Layer w20: v1(-1577.56,136.56) -1180.89,136.56 v1(-1148.34,104) ; v1(-1186.72,1157.72) v1(-1186.72,1245.49) ; v1(743,432) v1(743,1030)
  Top Layer w25: -1187,644 -1186.72,644.28 v1(-1186.72,1064.31)
  Top Layer w30: v2(-2700,1686.56) -2549.44,1686.56 -2533.7,1702.3 v2(-1712.3,1702.3)
  Top Layer w35: v1(-1247,644) -1187,644 v1(-967,644) -919,692 -733,692 -709,668 -709,607 -763,553 v2(-763,81) -763,-344 -962,-543 -1168.78,-543 P1.2
  Top Layer w50: v2(-763,81) 252.86,81 L1.2
  Bottom Layer w8: U2.30 -1245.86,954.07 -1218.22,926.44 U2.16 ; U2.37 v1(-1186.72,1064.31) -1088.69,1064.31 -1041.44,1111.56 U2.86 ; U2.46 -1332,1206.04 -1297,1206.04 ; -1356,1206.04 -1356,1253 -1340,1269 -1309,1269 -1296.96,1281.04 U2.55 ; -1296.96,1206.08 -1297,1206.04 ; U2.62 v1(-1186.72,1245.49) -1226.17,1206.04 -1297,1206.04
  Bottom Layer w10: C15.1@-1604.91,1064.31 U2.37 ; C16.1@-1222,677.3 -1218.22,681.08 U2.16 ; C14.1@-997.75,660.22 U2.2
  Bottom Layer w20: C23.1@-1912,1820.22 -1932,1800.22 U5.16 -1932,1705.22 -1917,1690.22 C20.2@-1844.09,1690.22 ; R16.1 R17.1 v1(-1577.56,136.56) ; P1.2 -1148.34,-396.12 R18.1 R1.1 R2.1 R3.1 ; v1(-1186.72,1064.31) v1(-1186.72,1157.72) ; U1.8 -769.4,64.7 C1.2 ; R8.2 R4.2 ; 300,-114 998,-114 1074,-38 1074,82 1038.11,117.89 R6.2 R4.2 ; v1(743,1030) R5.2 ; R20.2 R7.2 R4.2
  Bottom Layer w30: R14.1 v2(-2700,1686.56) -2928.44,1686.56 -3110,1505 -3110,-38 -2758,-390 -1321.78,-390 P1.2 ; C20.2 v2(-1712.3,1702.3)
  Bottom Layer w50: C19.1 C18.2 300,-114 L1.2 266.86,67 U4.4@-67,67
VPP: C7.1 D1.1 P1.1 R18.2 U2.13 | length 2233.3
  Top Layer w8: v1(-1172,495.22) -927,495.22 -927,494.81 -814,381.81 -814,-346.38 -892.2,-424.58 ; P1.1 -947,-479.78 -887,-419.78
  Bottom Layer w8: v1@-1170.98,495.22 U2.13 ; P1.1 -1065.66,-413.44 R18.2 ; D1.1 C7.1
VSYNC: U2.96 U3.11 | length 3632.8
  Top Layer w8: U3.11 -2592,859.57 -2621.35,830.22 -2707,830.22 -2777,900.22 -2817,900.22 -2842,875.22 -2842,405.42 -2742.8,306.22 -1836.2,306.22 -1577.2,565.22 -878,565.22 v1(-808,635.22) v1@-811.57,635.22
  Bottom Layer w8: U2.96 -842.95,954.07 -808,919.13 v1(-808,635.22)
WEE: R1.2 U1.7 U2.3 | length 1128.9
  Bottom Layer w8: R1.2 -1065.66,-113.44 -1002,-49.78 -897,-49.78 -873,-25.78 U1.7 ; U2.3 -1013.5,486.71 -909,382.22 -909,172.22 -872,135.22 U1.7@-872,80.22
X+: pad.8 R17.2 U2.9 U3.41 | length 2405
  Top Layer w8: U3.41 v1(-1727,-128.62) -1657,-58.62 v1(-1657,85.22)
  Bottom Layer w8: pad.8 v1(-1727,-128.62) -1425.84,-128.62 -1107.98,189.23 U2.9
X-: pad.6 U2.58 U3.43 | length 5067.7
  Top Layer w8: U3.43 v1(-1854.12,-49.88) ; v1(-1906,444) -2045,444 -2073,472 -2073,788 -1958,903 -1958,943 -1976.66,961.66 -1976.66,1199 -1964,1211.66 -1964,1355 -1941,1378 -1528.8,1378 -1487.8,1337 -1308,1337 -1281,1310 v1(-1281,1243) ; v1(-1642,375) -1607,340 -1168,340 -1137,371 -937,371 -908,342 -908,-60 -986,-138 -1575,-138 -1597.12,-115.88 v1(-1597.12,-49.88)
  Bottom Layer w8: pad.6 -1854.55,-50.32 v1(-1854.12,-49.88) v1(-1597.12,-49.88) ; v1(-1906,444) -1837,375 v1(-1642,375) ; v1(-1281,1243) -1249.72,1274.28 U2.58
Y+: pad.2@-2232,-10.51 R16.2 U2.11 U3.44 | length 2148
  Top Layer w8: U3.44 v1(-1732,-10.51)
  Bottom Layer w8: pad.2@-2232,-10.51 v1(-1732,-10.51) ; R16.2 v1(-1732,-10.51) ; U2.11 -1139.48,177.53 -1326.8,-9.78 -1727,-9.78 -1727.73,-10.51 v1(-1732,-10.51)
Y-: pad.7 U2.38 U3.42 | length 4903.1
  Top Layer w8: v1(-2321,495) -2321,394 -2282,355 v1(-2019,355) ; U3.42 v1(-1804.25,-89.25) ; v1(-1700,325) -1148,325 -1119,354 -958,354 -941,337 -941,-10 -1020.25,-89.25 v1(-1498.75,-89.25)
  Bottom Layer w8: v1@-2321,486 v1(-2321,495) -2321,786 -2193,914 -2193,1005 -2135,1063 -2026,1063 -2006,1083 -2006,1159 -1969.78,1195.22 -1603.02,1195.22 -1487.86,1080.06 U2.38 ; pad.7 -1804.69,-89.69 v1(-1804.25,-89.25) v1(-1498.75,-89.25) ; v1(-2019,355) -1989,325 v1(-1700,325)
pads on no net: U2.12 U2.14 U2.18 U2.19 U2.20 U2.28 U2.29 U2.34 U2.35 U2.40 U2.41 U2.42 U2.43 U2.44 U2.49 U2.51 U2.54 U2.56 U2.57 U2.59 U2.60 U2.66 U2.67 U2.79 U2.80 U2.83 U2.84 U2.87 U2.88 U2.89 U2.90 U2.92 U2.93 U2.94 U2.95 U2.98 U2.99 U2.100 U3.36 U5.7 U5.9

## Polygon pours and split planes (outlines as drawn)
GND on Top Layer "Bottom Layer-No Net" (solid, remove dead copper, pour order 1000): -3075,2088 1374.72,2088 1375,2087.72 1375,2052 1375,1825 1388,1825 1643,1825 1643,1766 1643,-375 1596,-375 1350,-375 1350,-390 1350,-647.28 800,-647.28 -3075,-647.28 -3075,-618 -3075,-359 -3177,-359 -3357,-359 -3357,-312 -3357,1825 -3326,1825 -3325,1824 -3326,1825 -3309,1825 -3075,1825
GND on Bottom Layer "Bottom Layer-No Net" (solid, remove dead copper, pour order 1001): -3075,2088 1374.72,2088 1375,2087.72 1375,2052 1375,1825 1388,1825 1643,1825 1643,1766 1643,-375 1596,-375 1350,-375 1350,-390 1350,-647.28 800,-647.28 -3075,-647.28 -3075,-618 -3075,-359 -3177,-359 -3357,-359 -3357,-312 -3357,1825 -3326,1825 -3325,1824 -3326,1825 -3309,1825 -3075,1825

## Keep-outs
Keep-Out Layer:
  lines w5: -3357,-547.28 ccw(c-3257,-547.28) -3257,-647.28 1543,-647.28 ccw(c1543,-547.28) 1643,-547.28 1643,1987.72 ccw(c1543,1987.72) 1543,2087.72 -3257,2087.72 ccw(c-3257,1987.72) -3357,1987.72 -3357,-547.28 ; -2477,-217.28 ccw(c-2452,-217.28) -2427,-217.28 -2427,82.72 ccw(c-2452,82.72) -2477,82.72 -2477,-217.28

## Other copper
Multi-Layer:
  region: -3357,1887.72 -3157,1887.72 -3157,2087.72 -3257,2087.72 ccw(c-3257,1987.72) -3357,1987.72
  region: -3357,-447.28 -3157,-447.28 -3157,-647.28 -3257,-647.28 cw(c-3257,-547.28) -3357,-547.28
  region: 1643,-447.28 1443,-447.28 1443,-647.28 1543,-647.28 ccw(c1543,-547.28) 1643,-547.28
  region: 1643,1887.72 1443,1887.72 1443,2087.72 1543,2087.72 cw(c1543,1987.72) 1643,1987.72

## Silkscreen, mask and mechanical layers (free items; w line width, h text height)
Bottom Overlay:
  lines w12: 417,1954.22 1067,1954.22 ; 417,1604.22 417,2004.22 1067,2004.22 1067,1604.22 417,1604.22
  text "Website : vitenda.com.vn" at 1345,-360 h59.06
  text "Email : techvietnamjsc@gmail.com" at 1345,-425 h59.06

## Dimensions
-3257,1987.72 to 1543,1987.72 on Top Overlay
1543,1987.72 to 1543,-547.28 on Top Overlay